# EAGLE board simpleCH552_typeA_finished (EAGLE 9.6.2)
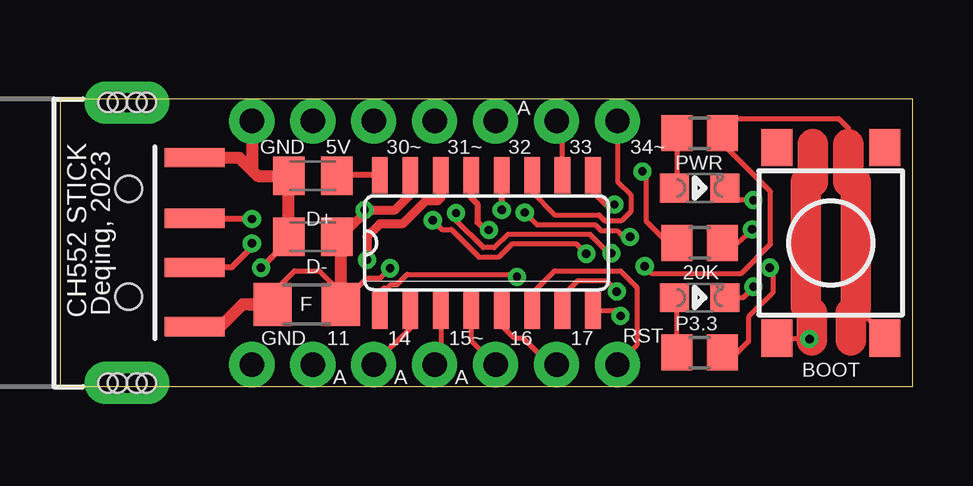
[diagram p0: board, top side]
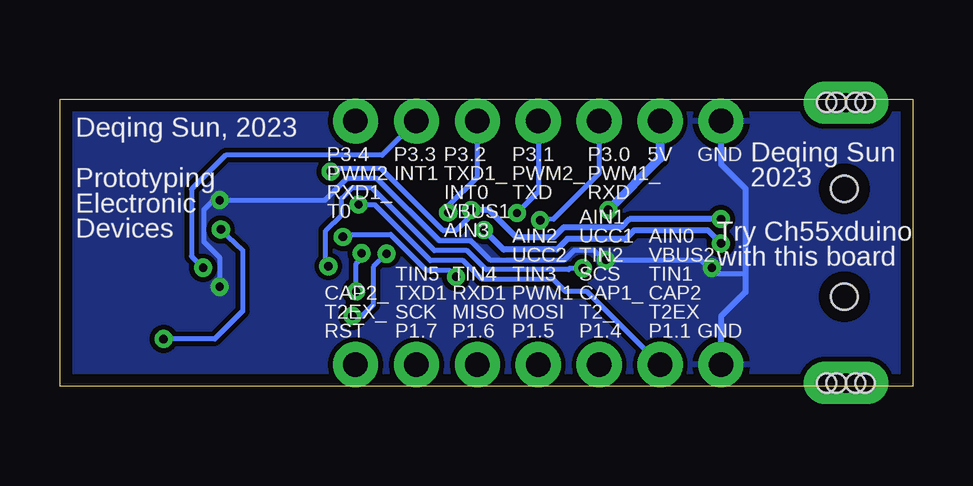
[diagram p1: board, bottom side, seen from below]

Size 35.56 x 11.99 mm. Coordinates in mm from the lower left corner, seen from the top.
Outline: 0,0 35.56,0 35.56,11.99 0,11.99 0,0
Copper layers (1*16): Top 0.035mm / dielectric 1.5mm / Bottom 0.035mm
Design rules "eagleRules10Mil *": minimum track width 8mil, minimum drill 0.3mm, track to track 8mil, track to pad 8mil, pad to pad 8mil, via to via 8mil, smd to smd 8mil, copper to edge 20mil, drill to drill 20mil, minimum pad ring 10mil, minimum via ring 8mil, stop-mask expansion 4mil, vias tented up to drill 14mil, thermal gap 10mil

## Footprints (pad centres in the part's own frame; a part is rotated, then mirrored left to right if it is on the bottom)
C0805K = smd 1.3 x 1.6: 1 -1,0; 2 1,0
R1206 = smd 1.6 x 1.803: 1 -1.422,0; 2 1.422,0
1X07_NO_SILK = drill 1.016 pad 1.88: 1 0,0; 2 2.54,0; 3 5.08,0; 4 7.62,0; 5 10.16,0; 6 12.7,0; 7 15.24,0
USB-A-SMT-MALE = smd 2.5 x 0.8: D+1 10.95,1.027; D-1 10.95,-1.027; GND1 10.95,3.551; VBUS1 10.95,-3.5 | drill 0.8 pad 1.778 long: SHLD1 8.13,-5.85; SHLD2 8.13,5.85 | hole 1.1: 8.2,2.25; 8.2,-2.25 | hole 0.8: 8.53,-5.85; 8.93,-5.85; 7.73,-5.85; 7.33,-5.85; 8.53,5.85; 8.93,5.85; 7.73,5.85; 7.33,5.85
GHI-BASICCOMPONENTS_0805-LED = smd 1.2 x 1.2: A 0,1.05; K 0,-1.05
R0805 = smd 1.3 x 1.5: 1 -0.95,0; 2 0.95,0
TACTILE_SWITCH_SMD_6.2MM_TALL = smd 1.55 x 1.3: A1 -3.975,-2.25; A2 3.975,-2.25; B1 -3.975,2.25; B2 3.975,2.25
MY_IC_SO16 = smd 0.66 x 1.524: 1 -4.445,-2.819; 2 -3.175,-2.819; 3 -1.905,-2.819; 4 -0.635,-2.819; 5 0.635,-2.819; 6 1.905,-2.819; 7 3.175,-2.819; 8 4.445,-2.819; 9 4.445,2.819; 10 3.175,2.819; 11 1.905,2.819; 12 0.635,2.819; 13 -0.635,2.819; 14 -1.905,2.819; 15 -3.175,2.819; 16 -4.445,2.819

## Placement (x,y rotation side)
C1  0.1uF  [C0805K]  10.54,6.25 180 top
C2  0.1uF  [C0805K]  10.54,8.79 180 top
F1  [R1206]  10.29,3.43 0 top
J1  [1X07_NO_SILK]  8,0.91 0 top
J2  [1X07_NO_SILK]  8,11.07 0 top
J4  USB_A_SMT_MALE  [USB-A-SMT-MALE]  -5.33,5.99 0 top
LED1  PWR  [GHI-BASICCOMPONENTS_0805-LED]  26.67,8.28 90 top
LED2  P3.3  [GHI-BASICCOMPONENTS_0805-LED]  26.67,3.71 90 top
R1  20K  [R0805]  26.67,5.99 0 top
R2  20K  [R0805]  26.67,10.57 180 top
R3  20K  [R0805]  26.67,1.42 180 top
S1  MOMENTARY-SWITCH-SPST-SMD-6.2MM-TALL  [TACTILE_SWITCH_SMD_6.2MM_TALL]  32.13,5.99 270 top
U2  CH552G  [MY_IC_SO16]  17.78,5.99 0 top

## Library data of the parts
C1 C2 = rcl; LCSC: C16834; SPICEPREFIX: C
F1 = adafruit; LCSC: C151162
J1 J2 = SparkFun-Connectors
J4 = SparkFun-Connectors; PROD_ID: CONN-11499
LED1 LED2 = BeagleBone_Black_Wireless
R1-R3 = rcl; SPICEPREFIX: R
S1 = SparkFun-Switches; PROD_ID: SWCH-11966; SF_SKU: COM-12992
U2 = myOwnLib; LCSC: C111292

## Nets
3.3V: C2.1 U2.16
+5V: C1.1 F1.1 F1.2 J2.2 J4.VBUS1 R2.1 S1.B2 U2.15
GND: C1.2 C2.2 J1.1 J2.1 J4.GND1 LED1.K LED2.K U2.14
N$1: R1.2 S1.A2
N$2: LED2.A R3.2
N$3: LED1.A R2.2
P1.1: J1.2 U2.9
P1.4: J1.3 U2.2
P1.5: J1.4 U2.3
P1.6: J1.5 U2.4
P1.7: J1.6 U2.5
P3.0: J2.3 U2.8
P3.1: J2.4 U2.7
P3.2: J2.5 U2.1
P3.3: J2.6 R3.1 U2.10
P3.4: J2.7 U2.11
RST: J1.7 U2.6
USB_D+: J4.D+1 R1.1 U2.12
USB_D-: J4.D-1 U2.13

## Tracks (layer width: path | path; a pad name or v marks a point on that pad's centre or on a via)
3.3V
  Top 0.254: U2.16 11.57,8.81 C2.1
+5V  (via drill 0.35)
  Top 0.203: F1.1 8.87,3.91 9.78,4.83 10.82,4.83 11.71,3.94 | F1.2 12.8,4.52 13.35,4.52 v13.76,4.93 | v24.37,5.02 24.67,4.72 28.4,4.72 29.62,5.94 29.62,8.13 27.71,10.03 27.71,10.47 R2.1 28.23,11.18 32.46,11.18 32.87,10.77 32.87,10.11 | S1.B2 34.38,2.14 33.17,3.3 33.12,3.35 33.12,3.25 32.97,3.1 | 33.17,8.53 32.87,8.53
  Top 0.254: C1.1 11.71,6.25 | 12.7,7.24 v12.7,7.37
  Top 0.305: 11.71,6.25 11.56,6.25 C1.1
  Top 0.381: v12.7,7.37 13.97,7.37 14.61,8 U2.15 | 11.71,6.25 12.7,7.24
  Top 0.508: F1.2 11.71,3.94 11.71,6.1 11.56,6.25 | 7.84,3.43 F1.1 7.62,3.43 6.73,2.54 5.66,2.54 J4.VBUS1
  Top 1.27: 33.17,8.53 33.17,3.3 | 32.87,10.11 32.87,8.53 | 32.97,3.1 32.97,1.93
  Bottom 0.203: v13.76,4.93 14.3,4.93 14.36,4.88 17.8,4.88 18.58,5.66 19.95,5.66 22.55,8.27 23.4,8.27 23.82,7.84 23.82,7.16 24.49,6.5 24.49,5.33 24.37,5.22 v24.37,5.02
  Bottom 0.381: J2.2 10.54,9.53 v12.7,7.37
GND  (via drill 0.35)
  Top 0.203: v28.91,7.77 28.23,7.77 LED1.K | LED2.K 28.48,3.71 28.91,4.13 v28.91,4.17
  Top 0.254: C1.2 9.54,6.11 v8.38,4.95
  Top 0.381: v12.8,5.28 12.8,6.25 13.34,6.78 14.28,6.78 15.24,7.75 15.75,7.75 15.88,7.87 U2.14
  Top 0.508: C1.2 C2.2 8.23,8.79 8,9.02 | J2.1 8,9.02 | J4.GND1 7.47,9.54 8,9.02
  Bottom 0.203: 6.99,4.7 8.26,4.7 8.84,5.28 v12.8,5.28 12.9,5.28 13.31,5.69 14.12,5.69 14.53,5.28 17.63,5.28 18.41,6.07 19.73,6.07 22.34,8.68 23.61,8.68 24.51,7.77 v28.91,7.77 29.16,7.77 29.57,7.37 29.57,6.04 28.91,5.38 v28.91,4.17
  Bottom 0.254: J2.1 8,9.27 6.99,8.26 6.99,4.7 6.99,3.94 8,2.92 J1.1
  pour Bottom: 0,0 35.56,0 35.56,11.99 0,11.99
N$1  (via drill 0.35)
  Top 0.203: R1.2 28.25,5.99 v28.85,6.55 | S1.A2 29.92,1.98 v31.24,1.98 31.29,1.98 31.34,1.93 | 31.09,8.53 31.39,8.53 | 31.09,3.34 31.34,3.08
  Top 1.27: 31.09,8.53 31.09,3.34 | 31.39,8.53 31.39,10.11 | 31.34,1.93 31.34,3.08
  Bottom 0.203: v28.85,6.55 27.94,5.69 27.94,3.15 29.11,1.98 v31.24,1.98
N$2
  Top 0.203: R3.2 25.72,3.61 LED2.A
N$3
  Top 0.203: R2.2 25.72,8.38 LED1.A
P1.1  (via drill 0.35)
  Top 0.203: v23.11,7.59 22.74,7.59 22.2,8.13 22.2,8.79 U2.9
  Bottom 0.203: J1.2 13.59,3.96 14.48,3.96 14.99,4.47 17.96,4.47 18.75,5.26 20.11,5.26 22.45,7.59 v23.11,7.59
P1.4
  Top 0.203: U2.2 14.61,2.44 J1.3
P1.5
  Top 0.203: U2.3 15.88,1.17 J1.4
P1.6
  Top 0.203: U2.4 17.14,1.93 J1.5
P1.7
  Top 0.203: U2.5 18.41,2.54 18.92,2.03 19.3,2.03 20.24,1.09 20.52,1.09 J1.6
P3.0  (via drill 0.35)
  Top 0.203: v15.54,6.93 15.93,6.55 16.32,6.55 17.48,5.38 18.28,5.38 18.84,5.94 21.54,5.94 v21.95,5.54 | U2.8 23.14,3.17 v23.37,2.95
  Bottom 0.203: J2.3 13.08,8.89 14.99,6.99 v15.54,6.93 | v23.37,2.95 22.96,2.95 22.5,3.4 22.5,4.98 v21.95,5.54
P3.1  (via drill 0.35)
  Top 0.203: v16.51,7.24 16.51,6.93 17.65,5.79 18.11,5.79 18.67,6.35 22.1,6.35 22.89,5.56 v22.99,5.56 | U2.7 20.95,3.79 21.59,4.42 22.76,4.42 v23.22,3.96
  Bottom 0.203: J2.4 15.62,8.13 v16.51,7.24 | v23.22,3.96 23.22,5.13 22.99,5.36 v22.99,5.56
P3.2  (via drill 0.35)
  Top 0.203: U2.1 13.34,3.94 13.51,4.12 13.67,4.12 13.8,4.25 14.04,4.25 14.48,4.68 18.94,4.68 v19.05,4.58 | v19.38,7.26 19.88,6.76 22.3,6.76 22.56,6.5 23.21,6.5 23.47,6.24 v23.77,6.24
  Bottom 0.203: J2.5 18.16,8.74 19.38,7.52 v19.38,7.26 | v19.05,4.58 19.33,4.85 20.28,4.85 21.77,6.34 23.66,6.34 v23.77,6.24
P3.3  (via drill 0.35)
  Top 0.203: U2.10 20.95,10.82 J2.6 | v29.59,4.95 29.72,4.83 29.72,3.91 28.7,2.9 28.7,1.88 28.25,1.42 R3.1
  Bottom 0.203: J2.6 22.12,9.65 28.65,9.65 30.07,8.23 30.07,5.43 v29.59,4.95
P3.4
  Top 0.203: U2.11 19.68,8.1 20.62,7.16 22.47,7.16 22.72,6.91 22.83,6.91 23.4,6.91 23.8,7.31 23.8,8 23.24,8.56 J2.7
RST
  Top 0.203: U2.6 19.68,3.89 20.62,4.83 23.37,4.83 24.05,4.14 24.05,1.72 J1.7
USB_D+  (via drill 0.35)
  Top 0.203: v24.28,8.97 24.43,8.81 24.43,6.91 25.35,5.99 R1.1
  Top 0.254: U2.12 v18.41,7.37 | v8,6.99 5.65,6.99 J4.D+1
  Bottom 0.203: v18.41,7.37 18.41,7.14 19.05,6.5 19.58,6.5 22.17,9.09 24.16,9.09 v24.28,8.97
  Bottom 0.254: v18.41,7.37 17.67,7.37 16.52,6.22 14.99,6.22 14.57,6.64 12.15,6.64 11.81,6.99 v8,6.99
USB_D-  (via drill 0.35)
  Top 0.254: v8,5.97 8,5.82 7.18,4.99 7.15,4.97 J4.D-1 | U2.13 17.14,7.87 17.4,7.62 17.4,6.86 17.73,6.53 v17.88,6.53
  Bottom 0.254: v8,5.97 8.56,6.53 11.62,6.53 12,6.15 14.41,6.15 14.85,5.71 17.07,5.71 v17.88,6.53

## Text on the board
tNames: A | GND | 5V | 30~ | 31~ | 32 | 33 | 34~ | PWR | D+ | D- | 20K | CH552 STICK | Deqing, 2023 | F | GND | 11 | 14 | 15~ | 16 | 17 | RST | P3.3 | A | A | A | BOOT
bNames: GND | 5V | P3.0 / PWM1_ / RXD | P3.1 / PWM2_ / TXD | P3.2 / TXD1_ / INT0 / VBUS1 / AIN3 | P3.3 / INT1 | P3.4 / PWM2 / RXD1_ / T0 | Deqing Sun / 2023 | Deqing Sun, 2023 / / Prototyping / Electronic / Devices | Try Ch55xduino / with this board | GND | AIN0 / VBUS2 / TIN1 / CAP2 / T2EX / P1.1 | AIN1 / UCC1 / TIN2 / SCS / CAP1_ / T2_ / P1.4 | AIN2 / UCC2 / TIN3 / PWM1 / MOSI / P1.5 | TIN4 / RXD1 / MISO / P1.6 | TIN5 / TXD1 / SCK / P1.7 | CAP2_ / T2EX_ / RST